# Altium PCB PCB1.PcbDoc
Units mil, origin at the board's own origin, x right, y up, seen from the top; angles counter-clockwise.
Board outline 3005 x 3690 mil, 2 copper layers (Top Layer, Bottom Layer); 27 components, 16 nets, 74 pads, 19 vias.
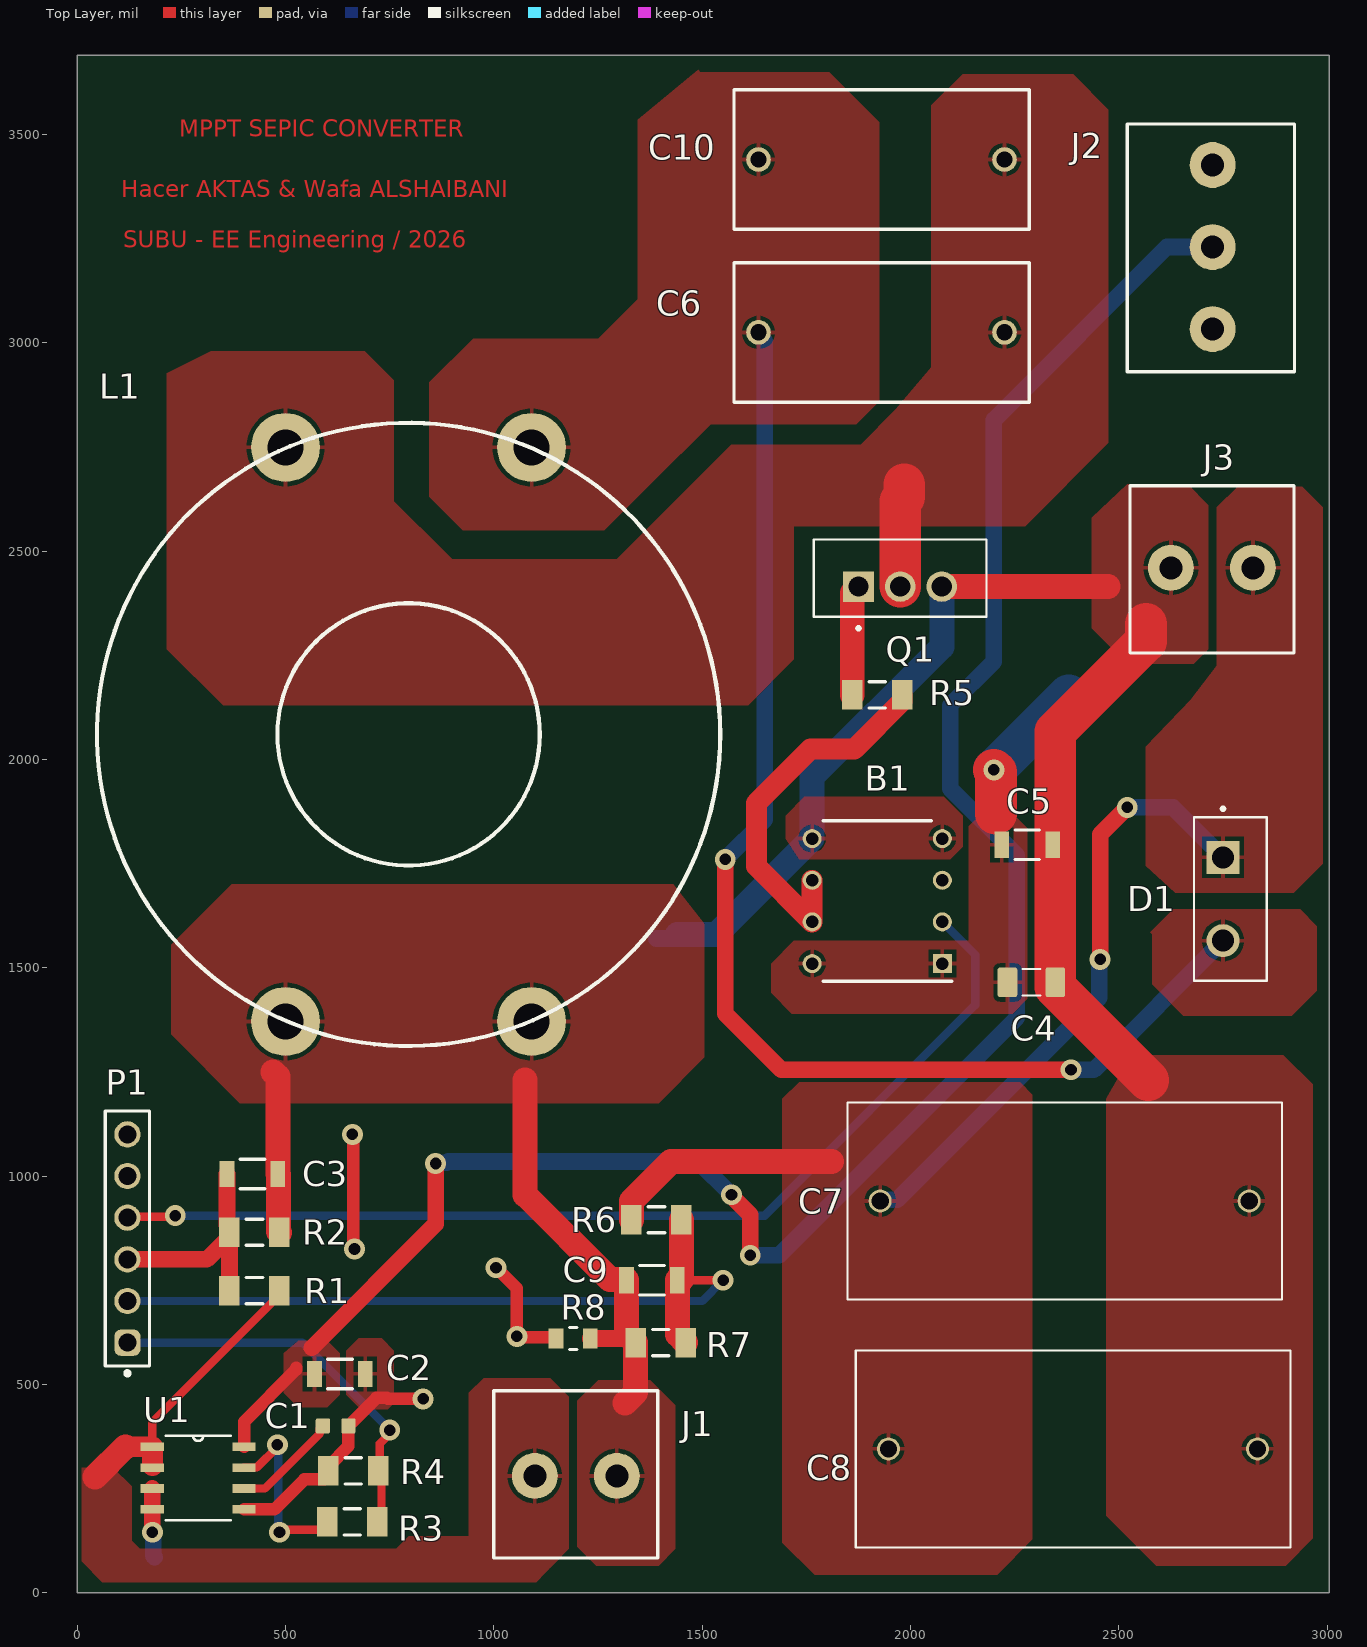
[diagram p0: Top Layer view]
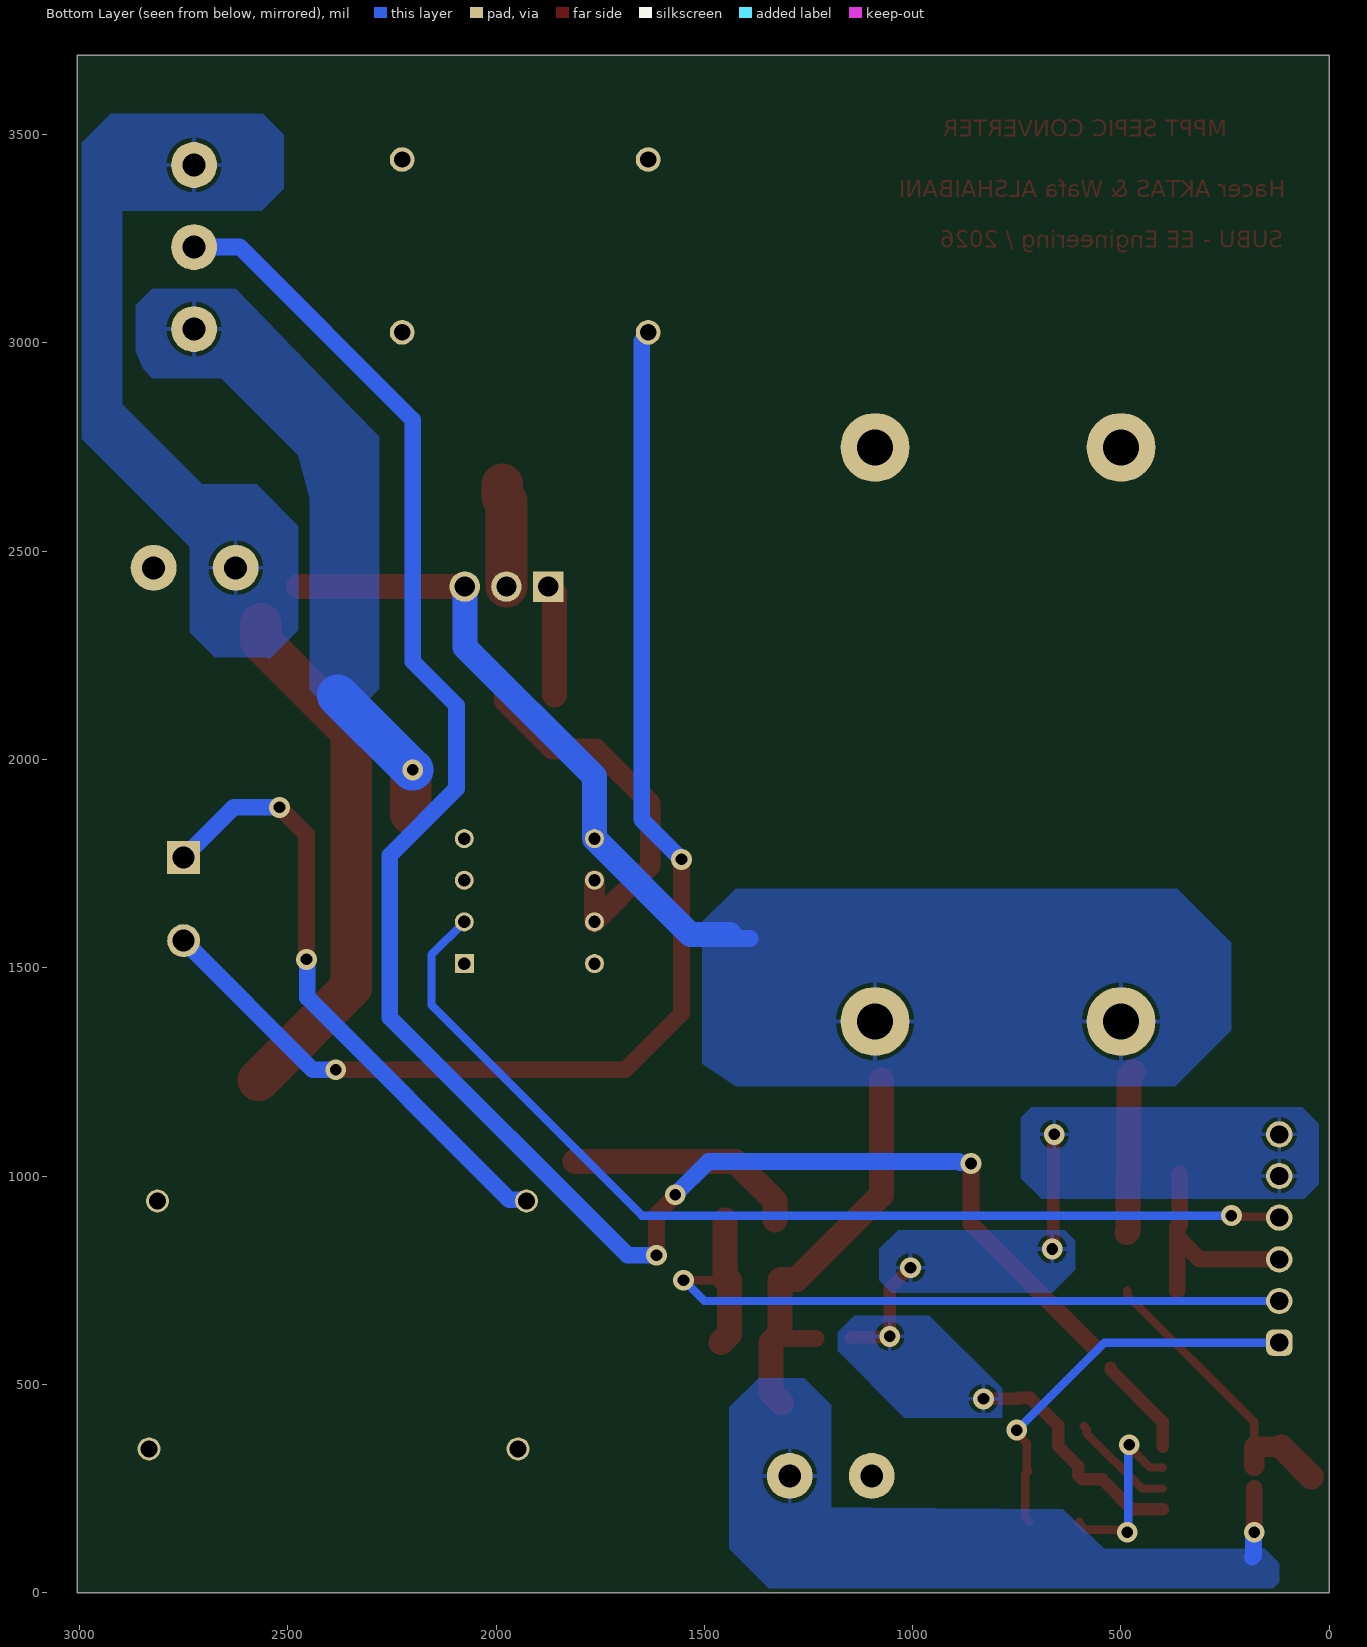
[diagram p1: Bottom Layer view, seen from below]
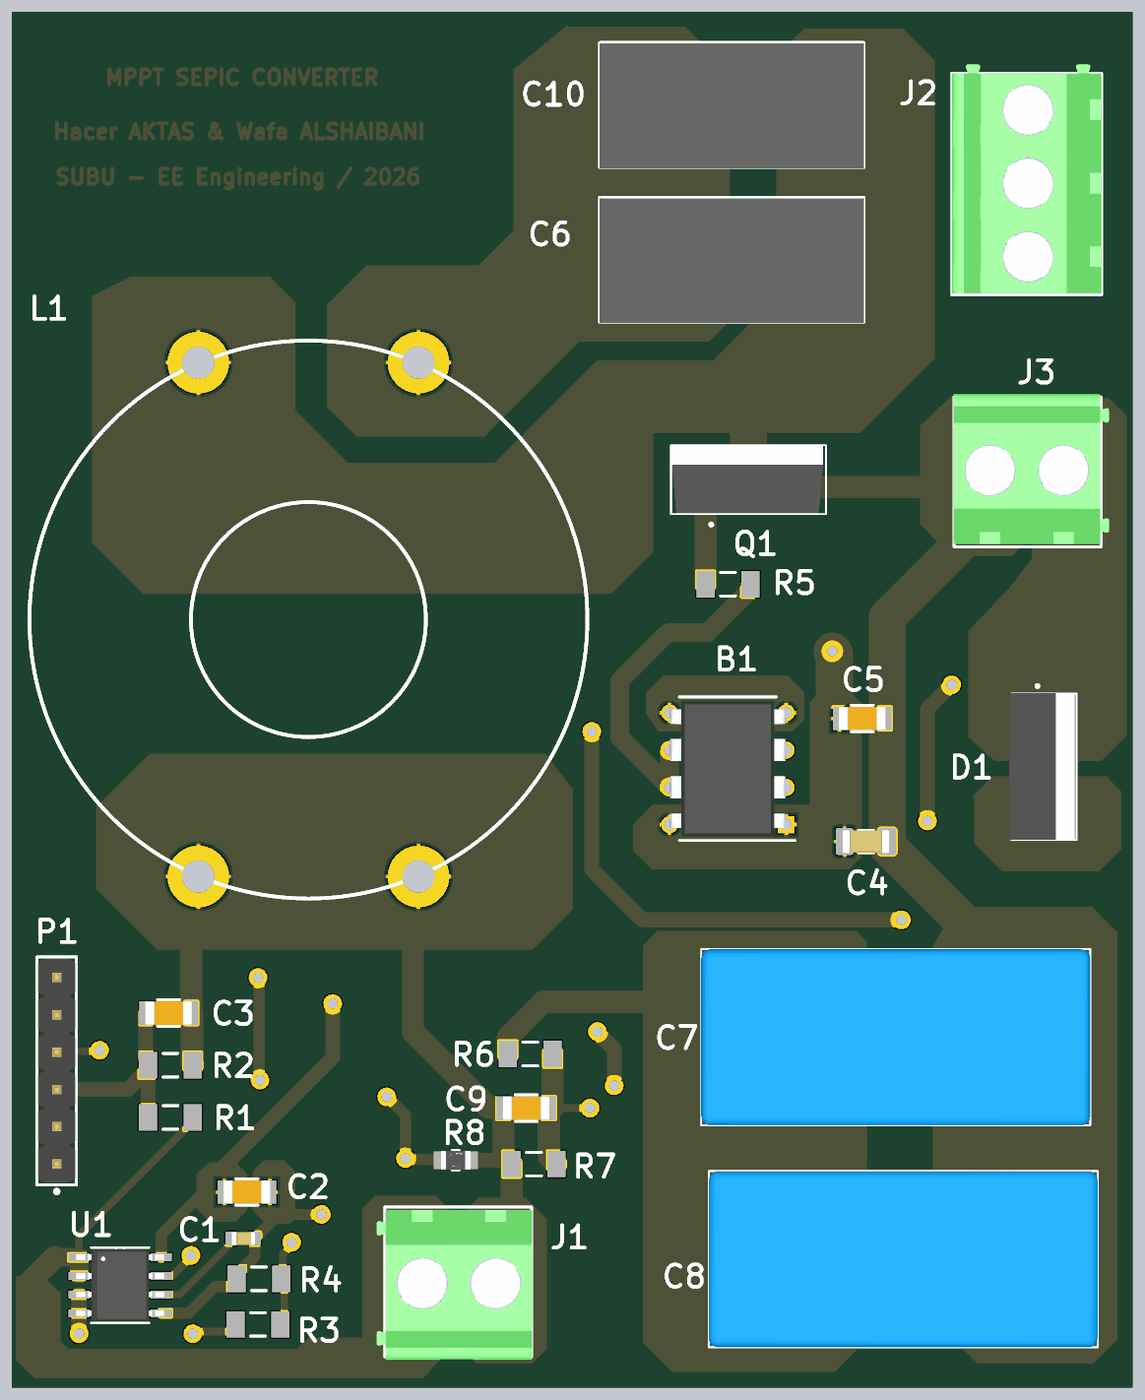
[diagram p2: 3D render of the assembled board from above, using the file's embedded part models]

## Layer stack, top to bottom
Top Solder: solder mask 0.4, Solder Resist, Dk 3.5
Top Layer: signal copper 1.4
Dielectric 1: dielectric 12.6, FR-4, Dk 4.8
Bottom Layer: signal copper 1.4
Bottom Solder: solder mask 0.4, Solder Resist, Dk 3.5

## Board outline
0,0 3005,0 3005,3690 0,3690

## Design rules (kind name [scope] priority, off if disabled: settings)
Clearance [All] p1: gap=10 ignorepadtopadclearanceinfootprint=FALSE
PolygonConnect [All] p1: connectstyle=Relief reliefconductorwidth=10 reliefentries=4 polygonreliefangle="90 Angle" airgapwidth=10
RoutingVias [All] p1: holewidth=28 width=50 viastyle="Through Hole" minholewidth=28 minwidth=50 maxholewidth=28 maxwidth=50
SolderMaskExpansion [All] p1: expansion=4 istentingtop=FALSE
SupplyNets "Schematic Supply Nets_6" [InNet('AGND')] p1: voltage=0.000
SupplyNets "Schematic Supply Nets_5" [InNet('PGND')] p2: voltage=0.000
SupplyNets "Schematic Supply Nets_4" [InNet('çıkış_ADC')] p3: voltage=0.000
SupplyNets "Schematic Supply Nets_3" [InNet('acs712_ADC')] p4: voltage=0.000
SupplyNets "Schematic Supply Nets_1" [InNet('giriş_ADC')] p5: voltage=0.000
SupplyNets "Schematic Supply Nets" [InNet('Besleme_8v-18v')] p6: voltage=0.000
Width [All] p1: maxlimit=100 minlimit=10 preferedwidth=10 minimp=50.000000 maximp=50.000000 favimp=50.000000
30 further rules are at their usual default settings.

## Components (designator, comment, footprint, x,y, rotation, side; value= is the part's Value field where it differs from the comment)
B1 "TC4420CPA" DIP794W56P254L946H432Q8N 1920,1660 r180 top
C1 "CL10B102KB8NNNC" CAPC1608X90N 620,400 r0 top
C2 "885342208004" WCAP-CSMH_1206_H1.6 630,525 r180 top
C3 "885342208004" WCAP-CSMH_1206_H1.6 420,1005 r180 top
C4 "CL31B106KOHNNNE" CAPC3216X180N 2290,1465 r180 top
C5 "885342208004" WCAP-CSMH_1206_H1.6 2280,1795 r180 top
C6 "B32522C0685K000" B32522C0685K000 2225.55,3025 r180 top
C7 "B32523R0226J000" CAPRR2250W80L2650T1200H2200 2370,940 r180 top
C8 "B32523R0226J000" CAPRR2250W80L2650T1200H2200 2390,345 r180 top
C9 "885342208004" WCAP-CSMH_1206_H1.6 1378.98,750 r0 top
C10 "B32522C0685K000" B32522C0685K000 2225.55,3440 r180 top
D1 "MBR10100G" TO508P997X444X1905-2 2750,1665 r270 top
J1 "691401710002B" 691401710002B 1295,280 r180 top
J2 "691401710003B" 691401710003B 2725,3033.15 r90 top
J3 "691401710002B" 691401710002B 2625,2460 r0 top
L1 "WE-CFWI_1312" "caupled ınductor" 795,2060 r90 top
P1 "61300611121" 61300611121 120,850 r90 top
Q1 "IXTP110N055T2 hortizol" TO254P1054X470X1955-3 1975,2415 r0 top
R1 "1206S4F5492T5E" RESC3116X65X40ML10T20 425,725 r0 top
R2 "RC1206FR-0710KL" RESC3116X65X40ML10T20 425,865 r180 top
R3 "RC1206JR-071KL" RESC3116X65X40ML10T20 660,170 r180 top
R4 "RC1206FR-072KL" RESC3116X65X40ML10T20 662.26,292.3 r0 top
R5 "1206S4F100JT5E" RESC3116X65X40ML10T20 1920.04,2155 r180 top
R6 "1206S4F4532T5E" RESC3116X65X40ML10T20 1389.96,895 r180 top
R7 "RC1206FR-0710KL" RESC3116X65X40ML10T20 1400,600 r0 top
R8 "0 ohm" FP-RT0805-MFG 1190,610 r0 top value=681Ω
U1 "ACS712ELCTR-05B-T" SOIC127P600X175-8N 290,275 r0 top

## Footprints (in the part's own frame and the unit in brackets; to place one, negate y for a bottom-side part, rotate by r counter-clockwise, add the part's x,y. Pads: shape width x height; smd on the part's side, far side on the other; paste and mask are expansions set on the pad)
61300611121 [mm] "Pin Header, pitch 2.54 mm, THT, Vertical, single row, 6p"
  rrect50% 1.6x1.6 hole 1.1: 1(-6.35,0)
  round 1.6 hole 1.1: 2(-3.81,0) 3(-1.27,0) 4(1.27,0) 5(3.81,0) 6(6.35,0)
  silkscreen extent -8.34,-1.35 7.77,1.35, body extent -7.62,-1.27 7.62,1.27, height 8.57
691401710002B [mm] "5.00 mm Screwless Horizontal Entry - 2.0 mm2 Wires, 2p"
  round 2.8 hole 1.4: 1(5,0) 2(0,0)
  silkscreen extent -2.5,-5.2 7.5,5, body extent -2.55,-5 8.05,5.2, height 14.1
691401710003B [mm] "5.00 mm Screwless Horizontal Entry - 2.0 mm2 Wires, 3p"
  round 2.8 hole 1.4: 1(0,0) 2(5,0) 3(10,0)
  silkscreen extent -2.6,-5 12.5,5.2, body extent -2.5,-5 13.1,5.2, height 2.5
B32522C0685K000 [mm]
  round 1.5 hole 1: 1(0,0) 2(15,0)
  silkscreen extent -1.5,-4.25 16.5,4.25, body extent -1.51,-4.19 16.49,4.31, height 14.6
CAPC1608X90N [mm]
  rrect25% 0.87x0.93 smd paste+0 mask+0.102: 1(-0.78,0) 2(0.78,0)
  body extent -0.77,-0.45 0.83,0.45, height 0.78
CAPC3216X180N [mm]
  rrect25% 1.2x1.82 smd: 1(-1.46,0) 2(1.46,0)
  silkscreen extent -0.54,-0.8 0.54,0.8, body extent -1.6,-0.8 1.6,0.8, height 1.8
CAPRR2250W80L2650T1200H2200 [mm]
  round 1.4 hole 1.05 mask+0.102: 1(-11.25,0) 2(11.25,0)
  silkscreen extent -13.25,-6 13.25,6, body extent -13.25,-6 13.25,6, height 20.55
"caupled ınductor" [mm]
  round 4.2 hole 2.2: 1(-17.5,7.5) 2(-17.5,-7.5) 3(17.5,-7.5) 4(17.5,7.5)
  silkscreen extent -19,-19 19,19
DIP794W56P254L946H432Q8N [mm]
  rect 1.16x1.16 / inner round 1.16 / far side rect 1.16x1.16 hole 0.76: 1(-3.97,3.81)
  round 1.16 hole 0.76: 2(-3.97,1.27) 3(-3.97,-1.27) 4(-3.97,-3.81) 5(3.97,-3.81) 6(3.97,-1.27) 7(3.97,1.27) 8(3.97,3.81)
  silkscreen extent -4.55,-4.89 3.3,4.89, body extent -3.94,-4.64 3.94,4.64, height 5.35
FP-RT0805-MFG [mm]
  rect 0.9x1.2 smd paste+0 mask+0: 1(-1.05,0) 2(1.05,0)
  silkscreen extent -0.23,-0.67 0.23,0.67, body extent -1.6,-0.77 1.6,0.77, height 0.25
RESC3116X65X40ML10T20 [mm] "Chip Resistor, 2-Leads, Body 3.10x1.60mm, IPC Low Density"
  rect 1.25x1.8 smd: 1(-1.525,0) 2(1.525,0)
  silkscreen extent -0.5,-0.8 0.5,0.8, body extent -1.6,-0.85 1.6,0.85, height 0.65
SOIC127P600X175-8N [mil]
  rect 56x21 smd: 1(-110,75) 2(-110,25) 3(-110,-25) 4(-110,-75) 5(110,-75) 6(110,-25) 7(110,25) 8(110,75)
  silkscreen extent -78,-101 78,101, body extent -118,-96 118,96, height 69
TO254P1054X470X1955-3 [mm]
  rect 1.86x1.86 / inner round 1.86 / far side rect 1.86x1.86 hole 1.24: 1(-2.54,0)
  round 1.86 hole 1.24: 2(0,0) 3(2.54,0)
  silkscreen extent -5.27,-2.64 5.27,2.86, body extent -5.2,-1.78 5.08,2.79, height 21.81
TO508P997X444X1905-2 [mm]
  rect 2.01x2.01 / inner round 2.01 / far side rect 2.01x2.01 hole 1.34: 1(-2.54,0)
  round 2.01 hole 1.34: 3(2.54,0)
  silkscreen extent -5.6,-1.78 4.98,2.67, body extent -5.02,-1.91 4.95,2.54, height 19.05
WCAP-CSMH_1206_H1.6 [mm] "Ceramic Capacitors, body 3.2x1.6mm"
  rect 0.9x1.6 smd: 1(-1.55,0) 2(1.55,0)
  silkscreen extent -0.75,-0.9 0.75,0.9, body extent -1.6,-0.8 1.6,0.8, height 1.6

## Part data
B1: "Microchip TC4420CPA, MOSFET Power Driver 6A, 4.5  18 V, Non-Inverting, 8-Pin PDIP", Manufacturer_Name=Microchip, Mouser Part Number=579-TC4420CPA, Arrow Part Number=TC4420CPA, Arrow Price/Stock=https://www.arrow.com/en/products/tc4420cpa_1/microchip-technology.html?utm_currency=USD&region=europe, Datasheet Link=http://uk.rs-online.com/web/p/products/6811124P, Geometry.Height=4.32mm, Manufacturer_Part_Number=TC4420CPA, Mouser Price/Stock=https://www.mouser.co.uk/ProductDetail/Microchip-Technology/TC4420CPA?qs=iwvYsH9bSFa1PGvH4l1FjA%3D%3D
C1 L1 U1: Package=None, Availability=Unavailable, Price=None
  C1: MF="{'manufacturer': u'Samsung Electro-Mechanics'}", MP=CL10B102KB8NNNC
  L1: MF="{'manufacturer': u'W\xfcrth Elektronik'}", MP=74485540101
  U1: MF="{'manufacturer': u'Allegro MicroSystems'}", MP=ACS712ELCTR-05B-T
C2 C3 C5 C9: library part CMP-03913-89205750-2, "0.1μF ±10% 250V Ceramic Capacitor X7R 1206 (3216 Metric)", Capacitance=100nF, Dielectric=X7R, Max Operating Temperature=125°C, Min Operating Temperature=-55°C, Voltage Rating=250V, Insulation Resistance=1GΩ, Height=1.6mm, Length=3.2mm, RoHS=Compliant, Voltage Rating (DC)=250V, Width=1.6mm
C4: "10 ÂµF Â±10% 16V Ceramic Capacitor X7R 1206 (3216 Metric)", Package="SMD-2 Samsung", Check_prices=https://www.snapeda.com/parts/CL31B106KOHNNNE/Samsung/view-part/?ref=eda, MF=Samsung, MP=CL31B106KOHNNNE, SnapEDA_Link=https://www.snapeda.com/parts/CL31B106KOHNNNE/Samsung/view-part/?ref=snap
C6 C10: "Metallized Polyester Capacitors (MKT), 6.8uF, 63V DC, 8.5mm(W) x 14.5mm(H) x 18mm(L)", Manufacturer_Name=TDK, Mouser Part Number=871-B32522C685K, Arrow Part Number=B32522C0685K000, Arrow Price/Stock=https://www.arrow.com/en/products/b32522c0685k000/epcos-tdk, Datasheet Link=https://product.tdk.com/system/files/dam/doc/product/capacitor/film/mkt/data_sheet/20/20/db/fc_2009/b32520_529.pdf, Geometry.Height=14.5mm, Manufacturer_Part_Number=B32522C0685K000, Mouser Price/Stock=https://www.mouser.co.uk/ProductDetail/EPCOS-TDK/B32522C0685K000?qs=Xovllr2ZOuapE0m0FCy1CA%3D%3D
C7 C8: "22 ÂµF Film Capacitor 40V 63V Polyester, Polyethylene Terephthalate (PET), Metallized - Stacked Radial", Package="NON-STANDARD-2 TDK", Check_prices=https://www.snapeda.com/parts/B32523R0226J000/TDK/view-part/?ref=eda, MF=TDK, MP=B32523R0226J000, SnapEDA_Link=https://www.snapeda.com/parts/B32523R0226J000/TDK/view-part/?ref=snap
D1: "Low Forward Voltage; Lead Temperature for Soldering Purposes: 260 C Max. for 10 Seconds; Low Power Loss/High Efficiency; Epoxy Meets UL94, VO at 1/8; 150 C Operating Junction Temperature; Case: Epoxy, Molded; Low Stored Charge Majority Carrier Conduction Mechanical Characteristics:; Weight: 1.9 grams (approximately); High Surge Capacity; Guard-Ring for Stress Protection; Finish: All External Surfaces Corrosion Resistant and Terminal Leads are Readily Solderable; AEC-Q101 Qualified and PPAP Capable; NRVB P", Manufacturer_Name=onsemi, Mouser Part Number=863-MBR10100G, Arrow Part Number=MBR10100G, Arrow Price/Stock=https://www.arrow.com/en/products/mbr10100g/on-semiconductor?utm_currency=USD&region=europe, Datasheet Link=https://www.onsemi.com/pub/Collateral/MBR1080-D.PDF, Geometry.Height=4.82mm, Manufacturer_Part_Number=MBR10100G, Mouser Price/Stock=https://www.mouser.co.uk/ProductDetail/onsemi/MBR10100G?qs=3JMERSakebrmlzTWRmdCeA%3D%3D
J1 J3: library part CMP-1502-03003-3, "Terminal Block, 5.00MM Screwless Horizontal, 2.0MM 2 Wires, 14-24 AWG, 2 Pin", Current Rating=10A, Max Operating Temperature=105°C, Min Operating Temperature=-40°C, Voltage Rating=300V, Contact Material=Tin, Height=13.5mm, Number of Contacts=2, Number of Rows=1, RoHS=Compliant
J2: library part CMP-1502-03004-3, "Terminal Block, 5.00MM Screwless Horizontal, 2.0MM 2 Wires, 14-24 AWG, 3 Pin"
P1: library part CMP-1502-01070-4, "THT Vertical Pin Header WR-PHD, Pitch 2.54 mm, Single Row, 6 pins", Color=Black, Contact Resistance=20mΩ, Current Rating=3A, Max Operating Temperature=105°C, Min Operating Temperature=-40°C, Operating Supply Voltage=250V, Connector Type="Male Pin", Contact Gender=Male, Contact Material=Gold, Contact Mating Length=5.9944mm, Contact Plating=Gold, Gender=Male, Height=8.89mm, Housing Material=PBT, Lead Free="Lead Free", Lead Pitch=2.54mm, Mount="Through Hole", Number of Contacts=6, Number of Pins=6, Number of Positions=6, Number of Rows=1, Orientation=Vertical, Packaging=Bulk, Pitch=2.54mm, RoHS=Compliant, Termination="Through Hole", Voltage Rating=250V
Q1: library part LM7805CT/NOPB, Package=None, Availability=Unavailable, MF="{'manufacturer': u'Texas Instruments'}", MP=LM7805CT/NOPB, Price=None
R1 R3 R6: library part RC1206FR-0710KL, "Chip Resistor, 10 KOhm, +/- 1%, 0.25 W, -55 to 155 degC, 1206 (3216 Metric), RoHS, Tape and Reel", Case Code (Metric)=3216, Case Code (Imperial)=1206, Manufacturer=Yageo, Max Operating Temperature=155degC, Min Operating Temperature=-55degC, Package Description="2-Pin Surface Mount Device, Body 3.1 x 1.6 mm", Package Quantity=5000, Package Reference=1206.0, Power Rating=250mW, Resistance=10KOhm, Temperature Coefficient=100ppm/degreesC, Tolerance=1%, Voltage Rating=200V, Case/Package=1206, Composition=ThickFilm, Datasheet URL=http://www.yageo.com/NewPortal/yageodocoutput?fileName=/pdf/R-Chip/PYu-RC_Group_51_RoHS_L_5.pdf, Datasheet Version="Rev. 5, 10/2016", Depth=1.6mm, Height=0.55mm, Lead Free=LeadFree, Length=3.1mm, Manufacturer URL=http://www.yageo.com/, Military Standard=Not, Packaging=TapeandReel, REACH SVHC=Unknown, RoHSCompliant=true, Termination=SMD/SMT, Width=1.6mm
R2 R7: "Chip Resistor, 10 KOhm, +/- 1%, 0.25 W, -55 to 155 degC, 1206 (3216 Metric), RoHS, Tape and Reel", Case Code (Metric)=3216, Case Code (Imperial)=1206, Manufacturer=Yageo, Max Operating Temperature=155degC, Min Operating Temperature=-55degC, Package Description="2-Pin Surface Mount Device, Body 3.1 x 1.6 mm", Package Quantity=5000, Package Reference=1206.0, Power Rating=250mW, Resistance=10KOhm, Temperature Coefficient=100ppm/degreesC, Tolerance=1%, Voltage Rating=200V, Case/Package=1206, Composition=ThickFilm, Datasheet URL=http://www.yageo.com/NewPortal/yageodocoutput?fileName=/pdf/R-Chip/PYu-RC_Group_51_RoHS_L_5.pdf, Datasheet Version="Rev. 5, 10/2016", Depth=1.6mm, Height=0.55mm, Lead Free=LeadFree, Length=3.1mm, Manufacturer URL=http://www.yageo.com/, Military Standard=Not, Packaging=TapeandReel, REACH SVHC=Unknown, RoHSCompliant=true, Termination=SMD/SMT, Width=1.6mm
R4: Manufacturer=Yageo, Part Number=RC1206FR-101K21L
R5: library part RC1206FR-0736KL, "Chip Resistor, 10 KOhm, +/- 1%, 0.25 W, -55 to 155 degC, 1206 (3216 Metric), RoHS, Tape and Reel", Case Code (Metric)=3216, Case Code (Imperial)=1206, Manufacturer=Yageo, Max Operating Temperature=155degC, Min Operating Temperature=-55degC, Package Description="2-Pin Surface Mount Device, Body 3.1 x 1.6 mm", Package Quantity=5000, Package Reference=1206.0, Power Rating=250mW, Resistance=10KOhm, Temperature Coefficient=100ppm/degreesC, Tolerance=1%, Voltage Rating=200V, Case/Package=1206, Composition=ThickFilm, Datasheet URL=http://www.yageo.com/NewPortal/yageodocoutput?fileName=/pdf/R-Chip/PYu-RC_Group_51_RoHS_L_5.pdf, Datasheet Version="Rev. 5, 10/2016", Depth=1.6mm, Height=0.55mm, Lead Free=LeadFree, Length=3.1mm, Manufacturer URL=http://www.yageo.com/, Military Standard=Not, Packaging=TapeandReel, REACH SVHC=Unknown, RoHSCompliant=true, Termination=SMD/SMT, Width=1.6mm
R8: "RES SMD 681 OHM 0.1% 1/8W 0805", Manufacturer=Yageo, Manufacturer Part Number=RT0805BRD07681RL, Package=RT0805, Power Rating=0.125W, Resistance=681Ω, Temperature="-55°C to +155°C", Temperature Coefficient="25 ppm/°C", Temperature Range High=+155°C, Temperature Range Low=-55°C, Tolerance=0.0025, Voltage Rating=150V, Automotive=No, Category=Res, ComponentLink2Description=Datasheet, ComponentLink2URL=http://www.yageo.com/documents/recent/PYu-RT_1-to-0.01_RoHS_L_9.pdf, Composition="Thin Film", Device Class L1="Passive Components", Device Class L2=Resistors, Device Class L3="Chip SMD Resistors", Digikey Description="RES SMD 681 OHM 0.1% 1/8W 0805", Footprint Url=http://www.yageo.com/exep/pages/download/literatures/PYu-R_Mount_10.pdf, Height=0.6mm, Lead Free=Yes, Mouser Description="Thin Film Resistors - SMD 1/8W 681 ohm .1% 25ppm", Octopart=https://octopart.com/rt0805brd07681rl-yageo-1270194, RoHS=TRUE, Series=RT, Ipc Land Pattern Name=RESC200125X50

## Via types
v1: diameter 50, hole 28, Top Layer to Bottom Layer, 19 vias

## Nets (pads, with @x,y where several pads share a name; then routed paths per layer and width w, separated by ;. In a path a pad name is that pad's centre, name@x,y a point inside that pad or via, vN(x,y) a via of type N, cw(c..) or ccw(c..) an arc to the next point about the centre after c; other vN are vias at no path point)
5v: C2.2 J2.2 U1.8 | length 4834
  Top Layer w30: U1.8 400,410 525,535 525,540
  Top Layer w40: 562.6,587.6 860,885 v1(860,1030) ; v1(1570,955) 1570,952.29 1615,907.29 v1(1615,810)
  Bottom Layer w40: v1(860,1030) 861.91,1031.91 886.91,1031.91 890,1035 1490,1035 v1(1570,955) ; v1(1615,810) 1685,810 2255,1380 2255,1770 2095,1930 2095,2130 2200,2235 2200,2815 2615,3230 J2.2
12v: B1.1 B1.8 C4.2 C5.2 J2.1 | length 361
  Top Layer w100: v1(2200,1975) 2205,1970 2205,1870
  Bottom Layer w100: v1(2200,1975) 2201.42,1975 2380,2153.58
acs712_ADC: P1.1 R3.1 R4.2 | length 955.8
  Top Layer w20: R3.1 730,179.96 730,284.61 R4.2 725.85,295.85 725.85,357.74 750,381.88 v1(750,390)
  Bottom Layer w20: P1.1 540,600 v1(750,390)
AGND: C1.2 C2.1 P1.5 P1.6 R4.1 R8.1 U1.5 | length 1143.7
  Top Layer w30: U1.5 473,200 544.87,271.87 592.62,271.87 602.22,281.48 602.22,303.13 650.71,351.61 650.71,401.18 652.83,403.31 654.02,403.31 717.93,467.22 742.78,467.22 745,465 v1(830,465) ; v1(660,1100) 662.5,1097.5 662.5,827.5 v1(665,825) ; v1(1005,780) 1055,730 v1(1055,615) ; v1@1057.5,612.5 1146.16,612.5 R8.1
  Bottom Layer w30: v1(830,465) v1@833.83,468.83
Besleme_8v-18v: J1.1 R1.2 U1.1 U1.2 | length 713.7
  Top Layer w20: U1.1 180,409.13 485.04,714.17 R1.2
  Top Layer w50: 115,350 U1.1 180,315 U1.2@180,305
  Top Layer w60: 42.63,277.63 115,350
giriş_ADC: C3.2 P1.3 R1.1 R2.2 | length 560.7
  Top Layer w40: P1.3 310.79,800 364.96,854.17 R2.2 ; C3.2 358.98,881.81 364.96,875.83 R2.2 ; R1.1 R2.2
NetB1_6: B1.6 B1.7 R5.1 | length 906.9
  Top Layer w50: B1.6 B1.7 1630,1743.7 1630,1895 1760,2025 1865,2025 1980.08,2140.08 R5.1
NetC1_1: C1.1 U1.6 | length 257.7
  Top Layer w20: U1.6 450,250 582.17,382.17 582.17,392.87 C1.1
NetC6_1: C6.1 C10.1 L1.4 Q1.2 | length 249.1
  Top Layer w100: Q1.2 1975,2620 1985,2630 1985,2660
NetC6_2: C6.2 C10.2 D1.3 L1.3 | length 3059.9
  Top Layer w40: v1(1555,1760) 1555,1390 1690,1255 v1(2385,1255)
  Bottom Layer w40: v1(1555,1760) 1650,1855 1650,3004.84 1635,3019.84 C6.2 ; v1(2385,1255) 2440,1255 D1.3
NetC7_2: C7.2 C8.2 D1.1 J3.1 R6.2 | length 2056.7
  Top Layer w40: v1(2455,1520) 2455,1820 v1@2519.9,1884.9
  Top Layer w60: R6.2 1329.92,939.92 1425,1035 1809.93,1035
  Bottom Layer w40: C7.2 1929.98,942.89 1967.89,942.89 2453.09,1428.09 2453.09,1518.09 v1(2455,1520) ; v1(2520,1885) 2630,1885 D1.1
NetQ1_1: Q1.1 R5.2 | length 266.2
  Top Layer w60: R5.2 1860,2400 Q1.1
NetR3_2: R3.2 U1.7 | length 444.6
  Top Layer w20: U1.7 400.5,300.5 430.5,300.5 480,350 v1(480,355) ; v1(485,145) 490.74,150.74 585.35,150.74 599.96,165.35 R3.2
  Bottom Layer w20: v1@480.9,354.1 482.5,352.5 482.5,147.5 v1(485,145)
PGND: B1.4 B1.5 C3.1 C4.1 C5.1 C7.1 C8.1 C9.1 J1.2 J2.3 J3.2 L1.1 L1.2 Q1.3 R2.1 R7.1 R8.2 U1.3 U1.4 | length 4498.1
  Top Layer w30: 2570.28,1230 2575,1230
  Top Layer w40: v1(180,145) U1.4 U1.3 ; R8.2 1330,610 1335.36,610 1339.96,605.39 R7.1
  Top Layer w60: 470,1250 481.02,1238.98 C3.1 481.54,1005 483.03,1003.5 483.03,867.01 R2.1 ; 1075,1230 1075,955 1278.5,751.5 1316.46,751.5 C9.1 1317.95,622.05 1330,610 R7.1 ; 1315,455 1339.96,479.96 R7.1 ; Q1.3 2473.84,2415
  Top Layer w100: C4.1@2347.48,1452.8 2570.28,1230 ; C4.1 2347.48,2066.42 2565,2283.94 2565,2325
  Bottom Layer w40: v1(180,145) 181.91,143.09 181.91,88.09 185,85 ; 1390,1570 1430,1570 1440,1580 1450,1590
  Bottom Layer w50: J2.3 J2.3@2741.3,3426.85
  Bottom Layer w60: 1440,1580 1533.7,1580 B1.5 1763.7,1958.7 2075,2270 Q1.3
tc44_PWM: B1.2 P1.4 | length 2478.8
  Top Layer w20: P1.4 122.5,902.5 232.5,902.5 v1(235,905)
  Bottom Layer w20: v1(235,905) 1650,905 2155,1410 2155,1531.3 B1.2
çıkış_ADC: C9.2 P1.2 R6.1 R7.2 | length 1873.1
  Top Layer w20: C9.2 v1(1550,750)
  Top Layer w60: R6.1 1450,751.5 1448.5,750 C9.2 1440,620.08 R7.2
  Bottom Layer w20: P1.2 1500,700 v1(1550,750)
pads on no net: B1.3

## Polygon pours and split planes (outlines as drawn)
PGND on Top Layer "BUS" (solid, pour order 23): 350,1680 370,1700 1430,1700 1505,1605 1505,1285 1395,1175 390,1175 225,1340 225,1555 355,1685
NetC6_2 on Top Layer "BUS" (solid, pour order 4): 950,3010 1250,3010 1355,2905 1355,2640 1265,2550 925,2550 845,2630 845,2905
NetC6_1 on Top Layer "BUS" (solid, pour order 2): 320,2980 690,2980 760,2910 760,2615 640,2495 295,2495 215,2575 215,2927.5
NetC6_1 on Top Layer "BUS" (solid, pour order 55): 2390,3645 2475,3560 2475,2990 2420,2935 2140,2935 2080,2875 2050,2905 2050,3570 2125,3645
NetC6_1 on Top Layer "BUS" (solid, pour order 8): 215,2575 215,2315 1645,2315 1720,2390 1720,2560 2275,2560 2475,2760 2475,2990 2090,2990 1965,2840 1880,2755 1570,2755 1295,2480 900,2480 742.89,2637.11
Besleme_8v-18v on Top Layer "BUS" (solid, pour order 35): 940,135 795,135 765,105 150,105 130,125 130,255 85,300 10,300 10,75 60,25 1101.92,25 1149.49,76.54
Besleme_8v-18v on Top Layer "BUS" (solid, pour order 31): 1135,515 1180,470 1180,105 1135,60 1015,60 940,135 940,480 975,515
NetC7_2 on Top Layer "BUS" (solid, pour order 29): 2800,2230 2755,2230 2565,2030 2565,1940 2960,1940 2990,1910 2990,2210 2990,2295
NetC6_2 on Top Layer "BUS" (solid, pour order 27): 2935,1640 2975,1600 2975,1445 2915,1385 2655,1385 2580,1460 2580,1580 2575,1585 2630,1640 2645,1640
NetC7_2 on Top Layer "BUS" (solid, pour order 26): 2635,1680 2920,1680 2990,1750 2990,1925 2890,2025 2650,2025 2565,1940 2565,1745
AGND on Top Layer "BUS" (solid, pour order 22): 730,610 760,580 760,455 745,440 680,440 645,475 645,580 675,610
5v on Top Layer "BUS" (solid, pour order 20): 530,605 600,605 630,575 630,475 600,445 530,445 495,480 495,575
PGND on Top Layer "BUS" (solid, pour order 18): 1375,510 1435,450 1435,105 1395,65 1245,65 1200,110 1200,460 1250,510
NetC7_2 on Top Layer "BUS" (solid, pour order 17): 2940,2655 2990,2605 2990,2285 2935,2230 2611.86,2064.07 2735.32,2225 2735.32,2605.32 2785,2655
PGND on Top Layer "BUS" (solid, pour order 16): 2520,2660 2665,2660 2715,2610 2715,2265 2680,2230 2520,2230 2435,2315 2435,2580
PGND on Top Layer "BUS" (solid, pour order 15): 1733.33,1760 2095,1760 2125,1790 2125,1865 2080,1910 1745,1910 1700,1865 1700,1810
12v on Top Layer "BUS" (solid, pour order 14): 2140,1565 1720,1565 1665,1510 1665,1440 1715,1390 2198.59,1390 2198.59,1506.41
12v on Top Layer "BUS" (solid, pour order 13): 2175,1875 2240,1875 2280,1835 2280,1425 2245,1390 2200,1390 2140,1450 2140,1840
PGND on Top Layer "BUS" (solid, pour order 12): 2530,1290 2895,1290 2965,1220 2965,130 2900,65 2590,65 2470,185 2470,1185
NetC7_2 on Top Layer "BUS" (solid, pour order 11): 1732.5,1225 2262.5,1225 2292.5,1195 2292.5,127.5 2207.5,42.5 1770,42.5 1692.5,120 1692.5,1185
NetC6_1 on Top Layer "BUS" (solid, pour order 9): 215,2315 215,2265 350,2130 1610,2130 1720,2240 1720,2430 1710,2440
NetC6_2 on Top Layer "BUS" (solid, pour order 7): 1250,3010 1410,3170 1550,3030 1550,2835 1345,2630 1270,2630
NetC6_2 on Top Layer "BUS" (solid, pour order 5): 1490,3655 1495,3650 1805,3650 1925,3530 1925,2860 1870,2805 1465,2805 1345,2925 1345,3535
PGND on Bottom Layer "BUS" (solid, pour order 46): 365,1690 1425,1690 1505,1610 1505,1270 1425,1215 1370,1215 370,1215 235,1350 235,1560
12v on Bottom Layer "BUS" (solid, pour order 52): 2280,2613.26 2280,2170 2315,2135 2415,2135 2447.5,2167.5 2447.5,2635.11
12v on Bottom Layer "BUS" (solid, pour order 50): 2625,3130 2825,3130 2865,3090 2865,2980 2847.5,2937.5 2825,2915 2660,2915 2475,2730 2447.5,2627.53 2439.78,2595 2280,2595 2280,2775 2345,2840
PGND on Bottom Layer "BUS" (solid, pour order 48): 2897.5,3317.5 2897.5,2852.5 2705,2660 2575,2660 2475,2560 2475,2310 2545,2240 2550,2245 2675,2245 2735,2305 2735,2510 2995,2770 2995,3480 2955,3520 2910,3520
PGND on Bottom Layer "BUS" (solid, pour order 47): 2925,3550 2975,3500 2975,3395 2897.5,3317.5 2562.5,3317.5 2510,3370 2510,3500 2560,3550 2565,3550
AGND on Bottom Layer "BUS" (solid, pour order 45): 785,490 960,665 1140,665 1180,625 1180,580 1020,420 785,420
AGND on Bottom Layer "BUS" (solid, pour order 44): 630,865 635,870 1035,870 1080,825 1080,750 1050,720 665,720 610,775 610,845
AGND on Bottom Layer "BUS" (solid, pour order 43): 65,1165 25,1125 25,980 60,945 690,945 740,995 740,1140 715,1165
PGND on Bottom Layer "BUS" (solid, pour order 40): 1251.25,197.5 1271.1,205.44 640,200 540,105 165,105 155,105 120,70 120,25 135,10 1345,10 1420,85 1420,205
PGND on Bottom Layer "BUS" (solid, pour order 39): 1260,515 1370,515 1440,445 1440,105 1400,65 1240,65 1195,110 1195,450

## Other copper
Top Layer:
  text "MPPT SEPIC CONVERTER" at 245,3495 h40
  text "Hacer AKTAS & Wafa ALSHAIBANI" at 105,3350 h40
  text "SUBU - EE Engineering / 2026" at 110,3228.33 h40

## Silkscreen, mask and mechanical layers (free items; w line width, h text height)
Drill Drawing:
  lines w0.1: -15,15 -5,5 ; -15,2760 0,2745 ; 3245,-510 3250,-515 ; 0,0 0,3345 0,3670 0,3690 3005,3690 3005,0 0,0